# EAGLE board pcb2d (EAGLE 9.7.0)
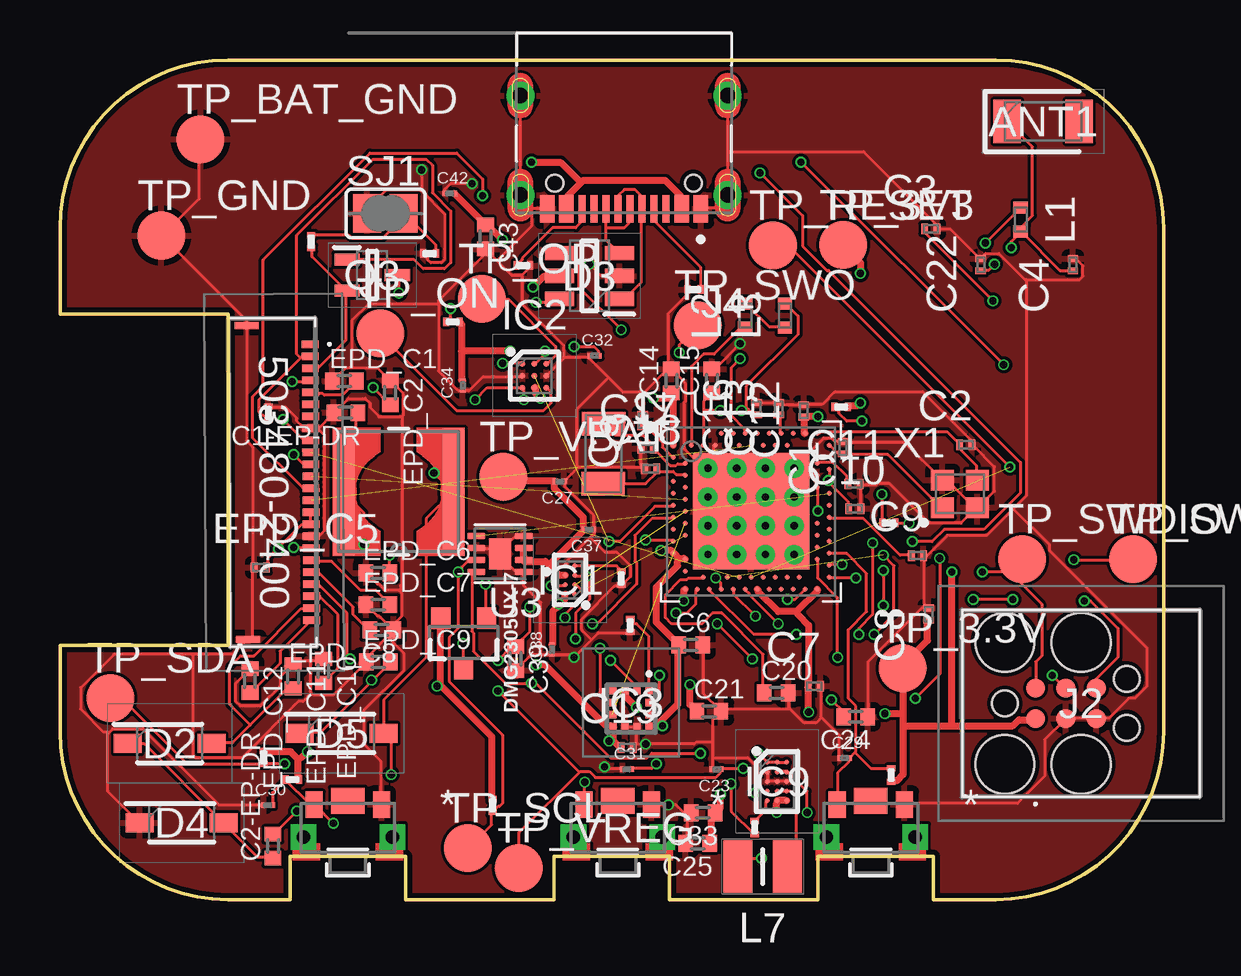
[diagram p0: board, top side]
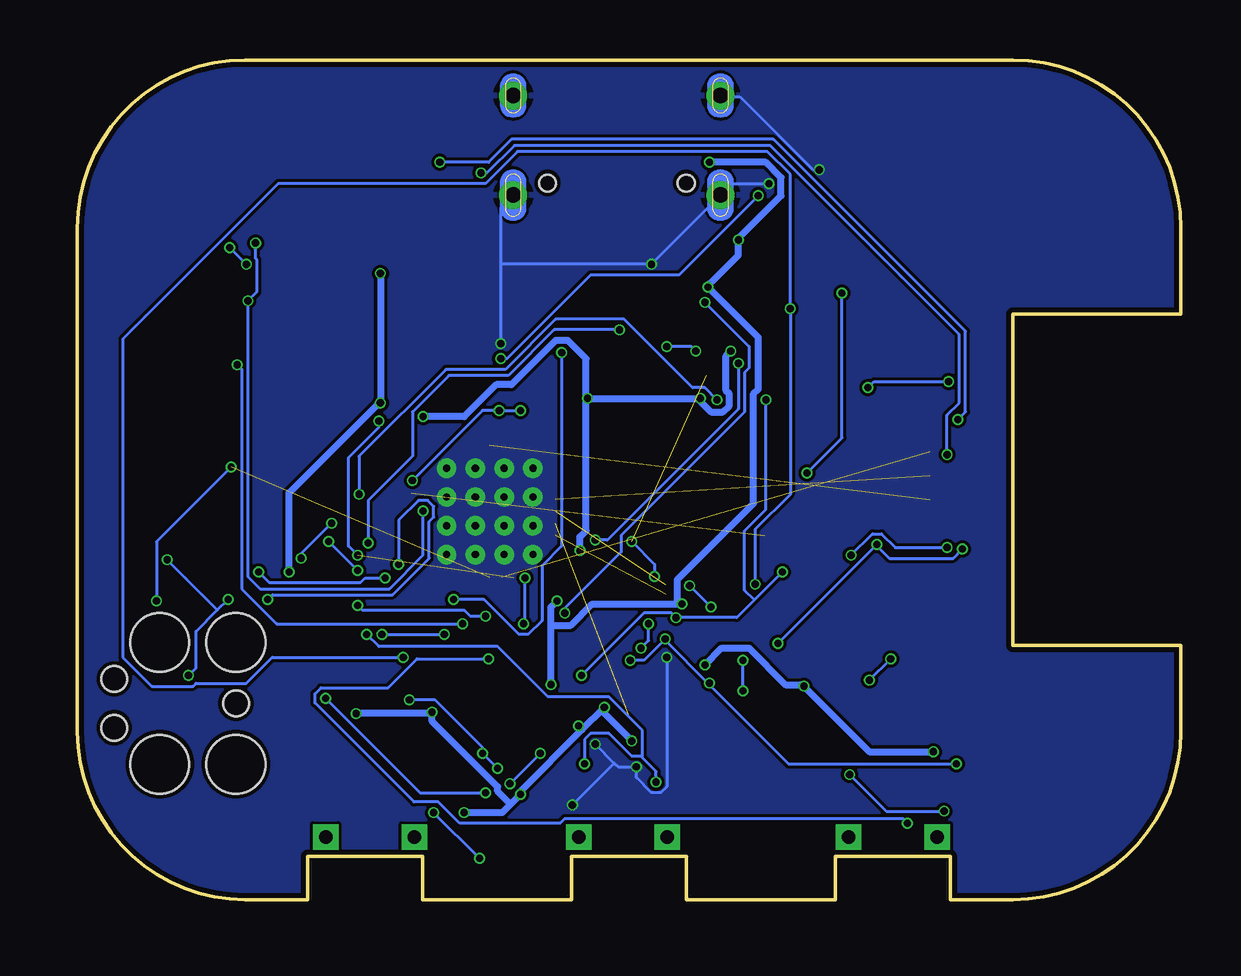
[diagram p1: board, bottom side, seen from below]

Size 46 x 35 mm. Coordinates in mm from the lower left corner, seen from the top.
Outline: 39,0 36.4,0 36.4,1.8 31.6,1.8 31.6,0 25.4,0 25.4,1.8 20.6,1.8 20.6,0 14.4,0 14.4,1.8 9.6,1.8 9.6,0 7,0 arc-90 0,7 0,10.6 7,10.6 7,24.4 0,24.4 0,28 arc-90 7,35 39,35 arc-90 46,28 46,7 arc-90 39,0
Copper layers (1*16): Top 0.035mm / dielectric 1.6mm / Bottom 0.035mm
Design rules "jlcpcb-2layers.dru *": minimum track width 5mil, minimum drill 0.3mm, track to track 5mil, track to pad 5mil, pad to pad 5mil, via to via 5mil, smd to smd 5mil, copper to edge 0.2mm, drill to drill 6mil, minimum pad ring 10mil, minimum via ring 3mil, stop-mask expansion 4mil, vias tented up to drill 0mil, thermal gap 10mil
Net classes: 1 TRASEEPUTERE: width 0.3 mm

## Footprints (pad centres in the part's own frame; a part is rotated, then mirrored left to right if it is on the bottom)
503480-2400_5034802400 = smd 0.3 x 0.7: 1 -5.75,1.525; 2 -5.25,1.525; 3 -4.75,1.525; 4 -4.25,1.525; 5 -3.75,1.525; 6 -3.25,1.525; 7 -2.75,1.525; 8 -2.25,1.525; 9 -1.75,1.525; 10 -1.25,1.525; 11 -0.75,1.525; 12 -0.25,1.525; 13 0.25,1.525; 14 0.75,1.525; 15 1.25,1.525; 16 1.75,1.525; 17 2.25,1.525; 18 2.75,1.525; 19 3.25,1.525; 20 3.75,1.525; 21 4.25,1.525; 22 4.75,1.525; 23 5.25,1.525; 24 5.75,1.525 | smd 0.3 x 1: MP1 -6.54,-1.125; MP2 6.54,-1.125
2450AT18B100E_ANTC3216X140N = smd 1.15 x 1.8: 1 -1.5,0; 2 1.5,0
NORDIC_NRF_3_RESC0201_L = smd 0.28 x 0.43: 1 -0.255,0; 2 0.255,0
PERFECT_0402_0402 = smd 0.6 x 0.7: 1 -0.5,0; 2 0.5,0
GRM011R60J152KE01L_2_CAPC0201X13N = smd 0.22 x 0.23: 1 -0.185,0; 2 0.185,0
ESP32_C6_LIBRARY_5_SOD3716X135N = smd 1.15 x 0.8: 1 -1.75,0; 2 1.75,0
ESP32_C6_LIBRARY_3_SOT95P280X145-6N = smd 1.2 x 0.6: 1 -1.25,0.95; 2 -1.25,0; 3 -1.25,-0.95; 4 1.25,-0.95; 5 1.25,0; 6 1.25,0.95
ESP32_C6_LIBRARY_4_ESP32_C6_LIBRARY_4_ESP32_C6_LIBRARY_4_ESP32_C6_LIBRARY_4_ESP32_WROVER_SPARKFUN-DISCRETESEMI_SOT23-3 = smd 0.8 x 0.9: 1 -0.95,-1; 2 0.95,-1; 3 0,1.1
BQ25180YBGR_BGA8C40P2X4_100X155X50 = smd 0.2 x 0.2: A1 -0.2,0.6; A2 0.2,0.6; B1 -0.2,0.2; B2 0.2,0.2; C1 -0.2,-0.2; C2 0.2,-0.2; D1 -0.2,-0.6; D2 0.2,-0.6
DRV2605YZFR_BGA9C50P3X3_144X144X62 = smd 0.25 x 0.25: A1 -0.5,0.5; A2 0,0.5; A3 0.5,0.5; B1 -0.5,0; B2 0,0; B3 0.5,0; C1 -0.5,-0.5; C2 0,-0.5; C3 0.5,-0.5
BMA423_BMA423 = smd 0.3 x 0.35: 1 -0.75,-0.775; 2 -0.25,-0.775; 3 0.25,-0.775; 4 0.75,-0.775; 7 0.75,0.775; 8 0.25,0.775; 9 -0.25,0.775; 10 -0.75,0.775 | smd 0.35 x 0.3: 5 0.775,-0.25; 6 0.775,0.25; 11 -0.775,0.25; 12 -0.775,-0.25
RT6160AWSC_BGA15C40P3X5_140X230X60 = smd 0.216 x 0.216: A1 -0.4,0.8; A2 0,0.8; A3 0.4,0.8; B1 -0.4,0.4; B2 0,0.4; B3 0.4,0.4; C1 -0.4,0; C2 0,0; C3 0.4,0; D1 -0.4,-0.4; D2 0,-0.4; D3 0.4,-0.4; E1 -0.4,-0.8; E2 0,-0.8; E3 0.4,-0.8
TC2030-IDC_TC2030IDC = smd 0.783 x 0.783: 1 -0.953,-0.635; 2 -0.953,0.635; 3 0.317,-0.635; 4 0.317,0.635; 5 1.588,-0.635; 6 1.588,0.635 | hole 2.451: -2.223,-2.54; -2.223,2.54; 0.952,-2.54; 0.952,2.54 | hole 1.067: -2.223,0; 2.857,-1.016; 2.857,1.016
KH-TYPE-C-16P_KINGHELM_KH-TYPE-C-16P = smd 0.6 x 1.15: A1_B12 -3.2,4.725; A4_B9 -2.4,4.725; A9_B4 2.4,4.725; A12_B1 3.2,4.725 | smd 0.3 x 1.15: A5 -1.25,4.725; A6 -0.25,4.725; A7 0.25,4.725; A8 1.25,4.725; B5 1.75,4.725; B6 0.75,4.725; B7 -0.75,4.725; B8 -1.75,4.725 | drill 0.65 pad 1.05: SH1 -4.32,0; SH2 4.32,0; SH3 -4.32,4.15; SH4 4.32,4.15 | hole 0.7: -2.89,3.65; 2.89,3.65
NORDIC_NRF_2_RESC0402_L = smd 0.5 x 0.6: 1 -0.5,0; 2 0.5,0
ESP32_C6_LIBRARY_2_IND_4828-WE-TPC_WRE = smd 0.9 x 5.3: 1 -2.286,0; 2 2.286,0
MLP2016SR47MT0S1_INDC2016X100N = smd 1.2 x 2.2: 1 -1.028,0; 2 1.028,0
ESP32_C6_LIBRARY_6_SOT65P210X110-3N = smd 1.05 x 0.5: 1 -1.05,0.65; 2 -1.05,-0.65; 3 1.05,0
CPF0201D7K68C1_0201 = smd 0.35 x 0.25: 1 0,0.275; 2 0,-0.275
ESP32_C6_LIBRARY_7_JUMPER_SJ = smd 1.168 x 1.6: 1 -0.762,0; 2 0.762,0
2025-10-22_07-23-44_LIBRARY_SW_EVP-AKE31A_PAN = smd 0.711 x 1.092: 1 -1.4,-0.972; 2 1.4,-0.972 | drill 0.559 pad 0.914 square: 3 -1.848,0.381; 4 1.848,0.381 | smd 1.397 x 1.092: 5 0,-1.124
HECTOR_WATCH_1_TP20R = smd 2 x 2: TP 0,0
NORDIC_NRF_4_AQFN50P700X700X85_HS-74N = smd 4.85 x 4.85: P$74 0,0 | drill 0.3 pad 0.6: P$75 -1.8,1.8; P$76 -0.6,1.8; P$77 0.6,1.8; P$78 1.8,1.8; P$79 -1.8,0.6; P$80 -0.6,0.6; P$81 0.6,0.6; P$82 1.8,0.6; P$83 -1.8,-0.6; P$84 -0.6,-0.6; P$85 0.6,-0.6; P$86 1.8,-0.6; P$87 -1.8,-1.8; P$88 -0.6,-1.8; P$89 0.6,-1.8; P$90 1.8,-1.8 | smd 0.2 x 0.2: P$A8 -1.25,3.25; P$A10 -0.75,3.25; P$A12 -0.25,3.25; P$A14 0.25,3.25; P$A16 0.75,3.25; P$A18 1.25,3.25; P$A20 1.75,3.25; P$A22 2.25,3.25; P$A23 2.75,3.25; P$AA24 3.25,-2.25; P$AB2 -2.75,-2.5; P$AC5 -2,-2.75; P$AC9 -1,-2.75; P$AC11 -0.5,-2.75; P$AC13 0,-2.75; P$AC15 0.5,-2.75; P$AC17 1,-2.75; P$AC19 1.5,-2.75; P$AC21 2,-2.75; P$AC24 3.25,-2.75; P$AD2 -2.75,-3.25; P$AD4 -2.25,-3.25; P$AD6 -1.75,-3.25; P$AD8 -1.25,-3.25; P$AD10 -0.75,-3.25; P$AD12 -0.25,-3.25; P$AD14 0.25,-3.25; P$AD16 0.75,-3.25; P$AD18 1.25,-3.25; P$AD20 1.75,-3.25; P$AD22 2.25,-3.25; P$AD23 2.75,-3.25; P$B1 -3.25,2.75; P$B3 -2.5,2.75; P$B5 -2,2.75; P$B7 -1.5,2.75; P$B9 -1,2.75; P$B11 -0.5,2.75; P$B13 0,2.75; P$B15 0.5,2.75; P$B17 1,2.75; P$B19 1.5,2.75; P$B24 3.25,2.75; P$C1 -3.25,2.25; P$D2 -2.75,2; P$D23 2.75,2; P$E24 3.25,1.75; P$F2 -2.75,1.5; P$F23 2.75,1.5; P$G1 -3.25,1.25; P$H2 -2.75,1; P$H23 2.75,1; P$J1 -3.25,0.75; P$J24 3.25,0.75; P$K2 -2.75,0.5; P$L1 -3.25,0.25; P$L24 3.25,0.25; P$M2 -2.75,0; P$N1 -3.25,-0.25; P$N24 3.25,-0.25; P$P2 -2.75,-0.5; P$P23 2.75,-0.5; P$R1 -3.25,-0.75; P$R24 3.25,-0.75; P$T2 -2.75,-1; P$T23 2.75,-1; P$U1 -3.25,-1.25; P$U24 3.25,-1.25; P$V23 2.75,-1.5; P$W1 -3.25,-1.75; P$W24 3.25,-1.75; P$Y2 -2.75,-2; P$Y23 2.75,-2
ESP32_C6_LIBRARY_SON50P200X200X80-9N = smd 0.76 x 0.27: 1 -0.985,0.75; 2 -0.985,0.25; 3 -0.985,-0.25; 4 -0.985,-0.75; 5 0.985,-0.75; 6 0.985,-0.25; 7 0.985,0.25; 8 0.985,0.75 | smd 0.9 x 1.3: 9 0,0
NORDIC_NRF_BT-XTAL_2016_N = smd 0.95 x 0.85: 1 -0.725,-0.575; 2 0.725,-0.575; 3 0.725,0.575; 4 -0.725,0.575
NORDIC_NRF_1_XTAL_3215_N = smd 1 x 1.8: 1 -1.25,0; 2 1.25,0

## Placement (x,y rotation side)
503480-2400  503480-2400_503480-2400  [503480-2400_5034802400]  8.94,17.39 270.3 top
ANT1  2450AT18B100E  [2450AT18B100E_ANTC3216X140N]  40.98,32.44 0 top
C1  12pF  [NORDIC_NRF_3_RESC0201_L]  32.64,18.84 90 top
C1-EP-DR  10uF  [PERFECT_0402_0402]  11.91,20.29 180 top
C2  12pF  [NORDIC_NRF_3_RESC0201_L]  37.76,18.96 0 top
C2-EP-DR  4.7uF/25V  [PERFECT_0402_0402]  8.88,2.22 90 top
C3  1pF  [NORDIC_NRF_3_RESC0201_L]  36.3,27.96 0 top
C4  1pF  [NORDIC_NRF_3_RESC0201_L]  42.22,26.46 90 top
C5  100nF  [NORDIC_NRF_3_RESC0201_L]  24.29,19.96 90 top
C6  4.7µF  [PERFECT_0402_0402]  26.29,10.62 0 top
C7  100nF  [NORDIC_NRF_3_RESC0201_L]  31.44,8.9 0 top
C8  100nF  [NORDIC_NRF_3_RESC0201_L]  36.21,11.9 90 top
C9  820pF  [NORDIC_NRF_3_RESC0201_L]  35.74,14.34 0 top
C10  N.C  [NORDIC_NRF_3_RESC0201_L]  33.13,16.29 0 top
C11  100pF  [NORDIC_NRF_3_RESC0201_L]  33.1,17.32 0 top
C12  100nF  [NORDIC_NRF_3_RESC0201_L]  31,20.37 90 top
C13  N.C  [NORDIC_NRF_3_RESC0201_L]  29.96,20.46 90 top
C14  4.7µF  [PERFECT_0402_0402]  25.48,21.62 90 top
C15  1.0µF  [PERFECT_0402_0402]  27.17,21.62 90 top
C16  47nF  [NORDIC_NRF_3_RESC0201_L]  29.04,20.46 90 top
C17  12pF  [NORDIC_NRF_3_RESC0201_L]  24.47,18.81 0 top
C18  12pF  [NORDIC_NRF_3_RESC0201_L]  24.62,17.96 0 top
C19  100nF  [NORDIC_NRF_3_RESC0201_L]  23.64,6.34 0 top
C20  4.7µF  [PERFECT_0402_0402]  29.86,8.62 0 top
C21  4.7µF  [PERFECT_0402_0402]  27.05,7.85 0 top
C22  N.C  [NORDIC_NRF_3_RESC0201_L]  38.38,26.46 90 top
C23  0.1uF  [GRM011R60J152KE01L_2_CAPC0201X13N]  27.37,5.43 180 top
C24  10uF  [PERFECT_0402_0402]  33.17,7.62 180 top
C25  22uF  [PERFECT_0402_0402]  26.58,2.34 180 top
C27  0.1uF  [GRM011R60J152KE01L_2_CAPC0201X13N]  20.83,17.43 180 top
C29  1uF  [GRM011R60J152KE01L_2_CAPC0201X13N]  32.71,5.89 0 top
C30  1uF  [GRM011R60J152KE01L_2_CAPC0201X13N]  8.67,3.93 0 top
C31  1uF  [GRM011R60J152KE01L_2_CAPC0201X13N]  23.63,5.43 0 top
C32  1uF  [GRM011R60J152KE01L_2_CAPC0201X13N]  22.28,22.67 0 top
C33  22uF  [PERFECT_0402_0402]  26.81,3.62 180 top
C34  0.1uF  [GRM011R60J152KE01L_2_CAPC0201X13N]  16.79,21.43 90 top
C37  1uF  [GRM011R60J152KE01L_2_CAPC0201X13N]  22.05,15.43 180 top
C38  1uF  [GRM011R60J152KE01L_2_CAPC0201X13N]  20.51,10.43 90 top
C39  10uF  [PERFECT_0402_0402]  18.99,10.05 270 top
C42  0.1uF  [GRM011R60J152KE01L_2_CAPC0201X13N]  16.25,29.43 0 top
C43  4.7uF  [PERFECT_0402_0402]  17.74,27.62 270 top
D2  MBR0530  [ESP32_C6_LIBRARY_5_SOD3716X135N]  4.57,6.5 0 top
D3  USBLC6-2SC6Y  [ESP32_C6_LIBRARY_3_SOT95P280X145-6N]  22.07,26 180 top
D4  MBR0530  [ESP32_C6_LIBRARY_5_SOD3716X135N]  5.07,3.2 0 top
D5  MBR0530  [ESP32_C6_LIBRARY_5_SOD3716X135N]  11.74,6.93 0 top
DMG2305UX-7  20V/4.2A/52mΩ/1.4W  [ESP32_C6_LIBRARY_4_ESP32_C6_LIBRARY_4_ESP32_C6_LIBRARY_4_ESP32_C6_LIBRARY_4_ESP32_WROVER_SPARKFUN-DISCRETESEMI_SOT23-3]  16.83,10.72 180 top
EPD_C1  1uF/50V  [PERFECT_0402_0402]  11.85,21.62 0 top
EPD_C2  1uF/50V  [PERFECT_0402_0402]  13.77,21.13 270 top
EPD_C5  0.1uF/50V  [NORDIC_NRF_3_RESC0201_L]  8.35,13.84 0 top
EPD_C6  1uF/50V  [PERFECT_0402_0402]  13.25,13.62 0 top
EPD_C7  1uF/50V  [PERFECT_0402_0402]  13.26,12.29 0 top
EPD_C8  1uF/50V  [PERFECT_0402_0402]  13.41,11.23 180 top
EPD_C9  1uF/50V  [PERFECT_0402_0402]  13.27,9.91 0 top
EPD_C10  1uF/50V  [PERFECT_0402_0402]  10.99,9.53 270 top
EPD_C11  1uF/50V  [PERFECT_0402_0402]  9.72,9.3 270 top
EPD_C12  1uF/50V  [PERFECT_0402_0402]  7.92,9.12 270 top
IC1  BQ25180YBGR  [BQ25180YBGR_BGA8C40P2X4_100X155X50]  21.26,13.32 180 top
IC2  DRV2605YZFR  [DRV2605YZFR_BGA9C50P3X3_144X144X62]  19.78,21.84 0 top
IC3  BMA421  [BMA423_BMA423]  23.81,7.96 180 top
IC9  RT6160AWSC  [RT6160AWSC_BGA15C40P3X5_140X230X60]  29.89,4.92 0 top
J2  TC2030-IDC  [TC2030-IDC_TC2030IDC]  41.61,8.18 0 top
J4  KH-TYPE-C-16P  [KH-TYPE-C-16P_KINGHELM_KH-TYPE-C-16P]  23.51,33.52 180 top
L1  3.9nH  [NORDIC_NRF_2_RESC0402_L]  40.05,28.34 270 top
L2  10µH  [NORDIC_NRF_2_RESC0402_L]  28.57,24.34 90 top
L3  15nH  [NORDIC_NRF_2_RESC0402_L]  30.22,24.34 90 top
L5  68uH  [ESP32_C6_LIBRARY_2_IND_4828-WE-TPC_WRE]  14.12,17 180 top
L7  FTC252012SR47MBCA  [MLP2016SR47MT0S1_INDC2016X100N]  29.29,1.38 0 top
Q3  SI1308EDL-T1-GE3  [ESP32_C6_LIBRARY_6_SOT65P210X110-3N]  13.01,26.03 0 top
R1_EP_DR  0.47  [CPF0201D7K68C1_0201]  10.47,27.43 0 top
R1_USB  5K1  [CPF0201D7K68C1_0201]  26.43,25.43 90 top
R2  0  [CPF0201D7K68C1_0201]  28.95,3 180 top
R2_EP_DR  10K  [CPF0201D7K68C1_0201]  8.69,20.28 0 top
R2_USB  5K1  [CPF0201D7K68C1_0201]  19.31,26.43 90 top
R3  0  [CPF0201D7K68C1_0201]  23.77,11.43 0 top
R4  0  [CPF0201D7K68C1_0201]  34.55,15.7 90 top
R5  10K  [CPF0201D7K68C1_0201]  9.69,5 90 top
R7  10K  [CPF0201D7K68C1_0201]  34.65,5.19 0 top
R8  10K  [CPF0201D7K68C1_0201]  32.56,20.53 90 top
R9  10K  [CPF0201D7K68C1_0201]  23.4,13.39 180 top
R17  3K3  [CPF0201D7K68C1_0201]  18.03,3.93 0 top
R18  3K3  [CPF0201D7K68C1_0201]  8.49,5.93 0 top
R_PWR_EPD  10K  [CPF0201D7K68C1_0201]  16.38,24.08 90 top
R_TYPE_SEL  2.2  [CPF0201D7K68C1_0201]  15.41,26.93 90 top
SJ1  [ESP32_C6_LIBRARY_7_JUMPER_SJ]  13.57,28.6 0 top
SW_DN  2025-10-22_07-23-44_LIBRARY_EVP-AKE31ASW_EVP-AKE31A_PAN  [2025-10-22_07-23-44_LIBRARY_SW_EVP-AKE31A_PAN]  33.8,2.99 180 top
SW_ENT  2025-10-22_07-23-44_LIBRARY_EVP-AKE31ASW_EVP-AKE31A_PAN  [2025-10-22_07-23-44_LIBRARY_SW_EVP-AKE31A_PAN]  23.25,2.99 180 top
SW_UP  2025-10-22_07-23-44_LIBRARY_EVP-AKE31ASW_EVP-AKE31A_PAN  [2025-10-22_07-23-44_LIBRARY_SW_EVP-AKE31A_PAN]  12,2.99 180 top
TP_3.3V  HECTOR_WATCH_1_TPTP20R  [HECTOR_WATCH_1_TP20R]  35.13,9.65 0 top
TP_3V3  HECTOR_WATCH_1_TPTP20R  [HECTOR_WATCH_1_TP20R]  32.65,27.28 0 top
TP_BAT_GND  HECTOR_WATCH_1_TPTP20R  [HECTOR_WATCH_1_TP20R]  5.86,31.69 0 top
TP_GND  HECTOR_WATCH_1_TPTP20R  [HECTOR_WATCH_1_TP20R]  4.22,27.68 0 top
TP_ON  HECTOR_WATCH_1_TPTP20R  [HECTOR_WATCH_1_TP20R]  13.35,23.6 0 top
TP_OP  HECTOR_WATCH_1_TPTP20R  [HECTOR_WATCH_1_TP20R]  17.59,25.04 0 top
TP_RESET  HECTOR_WATCH_1_TPTP20R  [HECTOR_WATCH_1_TP20R]  29.72,27.27 0 top
TP_SCL  HECTOR_WATCH_1_TPTP20R  [HECTOR_WATCH_1_TP20R]  17,2.14 0 top
TP_SDA  HECTOR_WATCH_1_TPTP20R  [HECTOR_WATCH_1_TP20R]  2.1,8.39 0 top
TP_SWDCLK  HECTOR_WATCH_1_TPTP20R  [HECTOR_WATCH_1_TP20R]  44.72,14.19 0 top
TP_SWDIO  HECTOR_WATCH_1_TPTP20R  [HECTOR_WATCH_1_TP20R]  40.1,14.19 0 top
TP_SWO  HECTOR_WATCH_1_TPTP20R  [HECTOR_WATCH_1_TP20R]  26.59,23.94 0 top
TP_VBAT  HECTOR_WATCH_1_TPTP20R  [HECTOR_WATCH_1_TP20R]  18.48,17.62 0 top
TP_VREG  HECTOR_WATCH_1_TPTP20R  [HECTOR_WATCH_1_TP20R]  19.12,1.31 0 top
U1  NRF52840_QF  [NORDIC_NRF_4_AQFN50P700X700X85_HS-74N]  28.81,16.18 0 top
U3  MAX17048G+T10  [ESP32_C6_LIBRARY_SON50P200X200X80-9N]  18.34,14.41 180 top
X1  32MHz  [NORDIC_NRF_BT-XTAL_2016_N]  37.51,16.91 0 top
X2  32.768kHz  [NORDIC_NRF_1_XTAL_3215_N]  22.65,18.58 269.4 top

## Library data of the parts
503480-2400 = LIBRARY; DESCRIPTION: FFC & FPC Connectors 0.5mm FPC RA SMT Dual Contact 24Ckt; HEIGHT: 1.87mm; MANUFACTURER_NAME: Molex; MANUFACTURER_PART_NUMBER: 503480-2400; MOUSER_PART_NUMBER: 538-503480-2400; MOUSER_PRICE-STOCK: https://www.mouser.co.uk/ProductDetail/Molex/503480-2400?qs=OAhjpuo3Vu7efIoxFh9AOw%3D%3D
ANT1 = LIBRARY; ARROW_PART_NUMBER: 2450AT18B100E; ARROW_PRICE-STOCK: https://www.arrow.com/en/products/2450at18b100e/johanson-dielectrics?utm_currency=USD&region=nac; DESCRIPTION: Antennas 2.45GHz ANTENNA; HEIGHT: 1.4mm; MANUFACTURER_NAME: JOHANSON TECHNOLOGY; MANUFACTURER_PART_NUMBER: 2450AT18B100E; MOUSER_PART_NUMBER: 609-2450AT18B100E; MOUSER_PRICE-STOCK: https://www.mouser.co.uk/ProductDetail/Johanson-Technology/2450AT18B100E?qs=yCnrNFeXz%252Bh5MFsFIXGZGA%3D%3D
C1 C1-EP-DR C2 C2-EP-DR C3-C22 C24 C25 C33 C39 C43 EPD_C1 EPD_C2 EPD_C5-EPD_C12 L1-L3 R1_EP_DR R1_USB R2 R2_EP_DR R2_USB R3-R5 R7-R9 R17 R18 R_PWR_EPD R_TYPE_SEL SJ1 TP_3.3V TP_3V3 TP_BAT_GND TP_GND TP_ON TP_OP TP_RESET TP_SCL TP_SDA TP_SWDCLK TP_SWDIO TP_SWO TP_VBAT TP_VREG U1 X1 X2 = LIBRARY
C23 C27 C29-C32 C34 C37 C38 C42 = LIBRARY; AVAILABILITY: In Stock; CHECK_PRICES: https://www.snapeda.com/parts/GRM011R60J152KE01L/Murata/view-part/?ref=eda; DESCRIPTION: SMD Capacitor X5R(EIA) with Capacitance: 1500pF Tol. 10%. Rated Voltage: 6.3Vdc; MF: Murata; MP: GRM011R60J152KE01L; PACKAGE: 0201 Murata; PRICE: None; SNAPEDA_LINK: https://www.snapeda.com/parts/GRM011R60J152KE01L/Murata/view-part/?ref=snap
D2 D4 D5 = LIBRARY; AVAILABILITY: In Stock; CHECK_PRICES: https://www.snapeda.com/parts/MBR0530/Onsemi/view-part/?ref=eda; DESCRIPTION: Diode Schottky 30 V 500mA Surface Mount SOD-123; MF: ON Semiconductor; MP: MBR0530; PACKAGE: SOD-123-2 ON Semiconductor; PRICE: None; PURCHASE-URL: https://www.snapeda.com/api/url_track_click_mouser/?unipart_id=179458&manufacturer=ON Semiconductor&part_name=MBR0530&search_term=None; SNAPEDA_LINK: https://www.snapeda.com/parts/MBR0530/Onsemi/view-part/?ref=snap
D3 = LIBRARY; AVAILABILITY: In Stock; CHECK_PRICES: https://www.snapeda.com/parts/USBLC6-2SC6Y/STMicroelectronics/view-part/?ref=eda; DESCRIPTION: 17V Clamp 5A (8/20µs) Ipp Tvs Diode Surface Mount SOT-23-6; MF: STMicroelectronics; MP: USBLC6-2SC6Y; PACKAGE: SOT-23-6 STMicroelectronics; PRICE: None; SNAPEDA_LINK: https://www.snapeda.com/parts/USBLC6-2SC6Y/STMicroelectronics/view-part/?ref=snap
DMG2305UX-7 = LIBRARY; PROD_ID: TRAN-14388
IC1 = LIBRARY; ARROW_PART_NUMBER: BQ25180YBGR; ARROW_PRICE-STOCK: https://www.arrow.com/en/products/bq25180ybgr/texas-instruments?utm_currency=USD&region=nac; DESCRIPTION: Charger IC Lithium Ion/Polymer, Lithium Iron Phosphate 8-DSBGA (1.6x1.1); HEIGHT: 0.5mm; MANUFACTURER_NAME: Texas Instruments; MANUFACTURER_PART_NUMBER: BQ25180YBGR; MOUSER_PART_NUMBER: 595-BQ25180YBGR; MOUSER_PRICE-STOCK: https://www.mouser.co.uk/ProductDetail/Texas-Instruments/BQ25180YBGR?qs=doiCPypUmgEWjAK%252BJAX6Tw%3D%3D
IC2 = LIBRARY; ARROW_PART_NUMBER: DRV2605YZFR; ARROW_PRICE-STOCK: https://www.arrow.com/en/products/drv2605yzfr/texas-instruments?region=nac; DESCRIPTION: Haptic Driver for ERM/LRA with Built-In Library and Smart Loop Architecture; HEIGHT: 0.625mm; MANUFACTURER_NAME: Texas Instruments; MANUFACTURER_PART_NUMBER: DRV2605YZFR
IC3 = LIBRARY; ARROW_PART_NUMBER: BMA423; ARROW_PRICE-STOCK: https://www.arrow.com/en/products/bma423/bosch; DESCRIPTION: Accelerometers Triaxial low-g 12bit Acceleration Sensor; HEIGHT: 1mm; MANUFACTURER_NAME: BOSCH; MANUFACTURER_PART_NUMBER: BMA423; MOUSER_PART_NUMBER: 262-BMA423; MOUSER_PRICE-STOCK: https://www.mouser.co.uk/ProductDetail/Bosch-Sensortec/BMA423?qs=HXFqYaX1Q2xC%252BSgeGoX3mg%3D%3D
IC9 = LIBRARY; DESCRIPTION: Buck-Boost Regulator Positive Output Step-Up/Step-Down I2C DC-DC Controller IC 15-WL-CSP (BSC) (1.4x2.3); HEIGHT: 0.6mm; MANUFACTURER_NAME: RICHTEK; MANUFACTURER_PART_NUMBER: RT6160AWSC; MOUSER_PART_NUMBER: 835-RT6160AWSC; MOUSER_PRICE-STOCK: https://www.mouser.co.uk/ProductDetail/Richtek/RT6160AWSC?qs=amGC7iS6iy%2FLd9PSoixZXQ%3D%3D
J2 = LIBRARY; DESCRIPTION: CABLE ADAPTER 6 POS; HEIGHT: 19mm; MANUFACTURER_NAME: Tag Connect; MANUFACTURER_PART_NUMBER: TC2030-IDC
J4 = LIBRARY; AVAILABILITY: Not in stock; CHECK_PRICES: https://www.snapeda.com/parts/KH-TYPE-C-16P/Kinghelm/view-part/?ref=eda; MF: kinghelm; MP: KH-TYPE-C-16P; PACKAGE: None; PRICE: None; SNAPEDA_LINK: https://www.snapeda.com/parts/KH-TYPE-C-16P/Kinghelm/view-part/?ref=snap
L5 = LIBRARY; COPYRIGHT: Copyright (C) 2024 Ultra Librarian. All rights reserved.; MANUFACTURER_PART_NUMBER: 744043680; MFR_NAME: Wurth Electronics
L7 = LIBRARY; DESCRIPTION: SMD / SMT Inductors (Coils), L=0.47?H, L x W x T :; HEIGHT: 1mm; JLCPCB: https://jlcpcb.com/partdetail/6763488-FTC252012SR47MBCA/C5832368; MANUFACTURER_NAME: TDK; MANUFACTURER_PART_NUMBER: FTC252012SR47MBCA
Q3 = LIBRARY; AVAILABILITY: In Stock; CHECK_PRICES: https://www.snapeda.com/parts/SI1308EDL-T1-GE3/Vishay+Siliconix/view-part/?ref=eda; DESCRIPTION: Si1308EDL-T1-GE3 N-channel MOSFET Transistor, 1.5 A, 30 V, 3-Pin SC-70 | Siliconix / Vishay SI1308EDL-T1-GE3; MF: Vishay Siliconix; MP: SI1308EDL-T1-GE3; PACKAGE: SOT-323 Vishay Semiconductor; PRICE: None; PURCHASE-URL: https://www.snapeda.com/api/url_track_click_mouser/?unipart_id=274603&manufacturer=Vishay Siliconix&part_name=SI1308EDL-T1-GE3&search_term=None; SNAPEDA_LINK: https://www.snapeda.com/parts/SI1308EDL-T1-GE3/Vishay+Siliconix/view-part/?ref=snap
SW_DN SW_ENT SW_UP = LIBRARY; COPYRIGHT: Copyright (C) 2025 Ultra Librarian. All rights reserved.; DIGI-KEY_PART_NUMBER_1: P123437TR-ND; DIGI-KEY_PART_NUMBER_2: P123437CT-ND; DIGI-KEY_PART_NUMBER_3: P123437DKR-ND; MANUFACTURER_NAME: Panasonic; MANUFACTURER_PART_NUMBER: EVP-AKE31A
U3 = LIBRARY; AVAILABILITY: In Stock; CHECK_PRICES: https://www.snapeda.com/parts/MAX17048G+T10/Analog+Devices/view-part/?ref=eda; DESCRIPTION: 3µA 1-Cell/2-Cell Fuel Gauge with ModelGauge; MF: Analog Devices; MP: MAX17048G+T10; PACKAGE: TDFN-8 Maxim; PRICE: None; PURCHASE-URL: https://www.snapeda.com/api/url_track_click_mouser/?unipart_id=329239&manufacturer=Analog Devices&part_name=MAX17048G+T10&search_term=None; SNAPEDA_LINK: https://www.snapeda.com/parts/MAX17048G+T10/Analog+Devices/view-part/?ref=snap

## Nets
3V3 [TRASEEPUTERE]: C6.1 C7.1 C8.1 C12.1 C14.1 C19.1 C25.1 C33.1 C34.2 DMG2305UX-7.2 IC2.C2 IC3.3 IC3.7 IC3.10 IC9.E2 IC9.E3 J2.1 R5.2 R7.2 R8.2 R17.1 R18.1 R_PWR_EPD.2 TP_3.3V.TP TP_3V3.TP U1.P$A22 U1.P$AD14 U1.P$AD23 U1.P$B1 U1.P$W1 U1.P$Y2
ALERT: U1.P$J24 U3.5
D+: D3.4 U1.P$AD6
D-: D3.6 U1.P$AD4
DN: D3.1 J4.A7 J4.B7
DP: D3.3 J4.A6 J4.B6
EPD_3V3: 503480-2400.15 503480-2400.16 C1-EP-DR.1 DMG2305UX-7.3 EPD_C5.2 L5.2
EPD_BUSY: 503480-2400.9 U1.P$AD12
EPD_CS: 503480-2400.12 U1.P$K2
EPD_DC: 503480-2400.11 U1.P$AD10
EPD_RST: 503480-2400.10 U1.P$AC11
GDR: 503480-2400.2 Q3.1 R2_EP_DR.2
GND: 503480-2400.8 503480-2400.17 503480-2400.MP1 503480-2400.MP2 C1-EP-DR.2 C1.2 C2.2 C3.2 C4.2 C5.2 C6.2 C7.2 C8.2 C9.2 C10.2 C11.2 C12.2 C13.2 C14.2 C15.2 C16.2 C17.1 C18.1 C19.2 C20.2 C21.2 C22.2 C23.2 C24.1 C25.2 C27.1 C29.1 C30.1 C31.1 C32.1 C33.2 C34.1 C37.1 C38.1 C39.2 C42.1 C43.2 D3.2 D4.1 EPD_C1.1 EPD_C2.1 EPD_C5.1 EPD_C6.1 EPD_C7.1 EPD_C8.1 EPD_C9.1 EPD_C10.1 EPD_C11.1 EPD_C12.1 IC1.D2 IC2.B1 IC2.B3 IC3.8 IC3.9 IC9.B1 IC9.C1 IC9.C2 IC9.C3 J2.3 J2.5 J4.A1_B12 J4.A12_B1 J4.SH1 J4.SH2 J4.SH3 J4.SH4 R1_USB.1 R2_EP_DR.1 R2_USB.2 R3.2 R9.1 R_TYPE_SEL.1 SJ1.1 SW_DN.1 SW_ENT.1 SW_UP.1 TP_BAT_GND.TP TP_GND.TP U1.P$74 U1.P$75 U1.P$76 U1.P$77 U1.P$78 U1.P$79 U1.P$80 U1.P$81 U1.P$82 U1.P$83 U1.P$84 U1.P$85 U1.P$86 U1.P$87 U1.P$88 U1.P$89 U1.P$90 U1.P$B7 U1.P$F23 U3.1 U3.4 U3.6 U3.9 X1.2 X1.4
HAPTIC_EN: IC2.A1 U1.P$U1
IMU_INT1: IC3.5 U1.P$N1
IMU_INT2: IC3.6 U1.P$P2
LX1: IC9.B2 IC9.B3 L7.1
LX2: IC9.D2 IC9.D3 L7.2
MOSI: 503480-2400.14 U1.P$B13
N$2: C3.1 L1.1 U1.P$H23
N$3: IC9.D1 R4.2
N$4: IC1.D1 R9.2
N$5: C9.1 U1.P$N24
N$6: IC9.E1 R2.2
N$7: ANT1.1 C4.1 C22.1 L1.2
N$8: C11.1 U1.P$D23
N$9: IC3.1 R3.1
N$10: L2.2 L3.1
N$11: C20.1 U1.P$AC5
N$12: C5.1 U1.P$C1
N$13: C17.2 U1.P$D2 X2.1
N$14: C18.2 U1.P$F2 X2.2
N$15: C1.1 U1.P$B24 X1.1
N$17: C2.1 U1.P$A23 X1.3
N$18: C10.1 C15.1 C16.1 L3.2 U1.P$B5 U1.P$E24
N$19: C13.1 U1.P$A18
N$20: L2.1 U1.P$B3
N$22: C2-EP-DR.2 D5.2 L5.1 Q3.3
N$23: C2-EP-DR.1 D2.1 D4.2
N$24: R1_EP_DR.1 R_TYPE_SEL.2 SJ1.2
N$26: 503480-2400.5 EPD_C1.2
N$27: 503480-2400.4 EPD_C2.2
N$28: 503480-2400.18 EPD_C6.2
N$29: C32.2 IC2.A2
N$30: 503480-2400.19 EPD_C7.2
N$31: 503480-2400.20 EPD_C8.2
N$33: 503480-2400.22 EPD_C10.2
N$35: 503480-2400.24 EPD_C12.2
N$37: J4.A5 R1_USB.2
N$40: J4.B5 R2_USB.1
OUT+: IC2.A3 TP_OP.TP
OUT-: IC2.C3 TP_ON.TP
P0.04: U1.P$J1
P0.09: U1.P$L24
P0.13: C30.2 R5.1 SW_UP.2 U1.P$AD8
P0.14: C31.2 R8.1 SW_ENT.2 U1.P$AC9
P0.19: U1.P$AC15
P0.20: U1.P$AD16
P0.21: U1.P$AC17
P0.22: U1.P$AD18
P0.23: U1.P$AC19
P0.24: U1.P$AD20
P0.25: U1.P$AC21
P0.26: U1.P$G1
P0.27: U1.P$H2
P0.28: U1.P$B11
P0.29: U1.P$A10
P0.30: U1.P$B9
P0.31: U1.P$A8
P1.01: DMG2305UX-7.1 R_PWR_EPD.1 U1.P$Y23
P1.02: C29.2 R7.1 SW_DN.2 U1.P$W24
P1.03: U1.P$V23
P1.04: U1.P$U24
P1.05: U1.P$T23
P1.06: U1.P$R24
P1.07: U1.P$P23
P1.09: U1.P$R1
P1.10: U1.P$A20
P1.11: U1.P$B19
P1.12: U1.P$B17
P1.13: U1.P$A16
P1.14: U1.P$B15
P1.15: U1.P$A14
PMIC_INT: IC1.A1 U1.P$T2
PREVGH: 503480-2400.21 D5.1 EPD_C9.2
PREVGL: 503480-2400.23 D2.2 EPD_C11.2
RESE: 503480-2400.3 Q3.2 R1_EP_DR.2
RESET: J2.6 TP_RESET.TP U1.P$AC13
SCK: 503480-2400.13 U1.P$A12
SCL: IC1.B1 IC2.C1 IC3.12 R4.1 R17.2 TP_SCL.TP U1.P$M2 U3.7
SDA: IC1.C1 IC2.B2 IC3.2 R2.1 R18.2 TP_SDA.TP U1.P$L1 U3.8
SWDCLK: J2.4 TP_SWDCLK.TP U1.P$AA24
SWDIO: J2.2 TP_SWDIO.TP U1.P$AC24
SWO: TP_SWO.TP U1.P$AD22
VBAT [TRASEEPUTERE]: C27.2 C37.2 IC1.C2 TP_VBAT.TP U3.2 U3.3
VBUS [TRASEEPUTERE]: C21.1 C38.2 C42.2 C43.1 D3.5 IC1.A2 J4.A4_B9 J4.A9_B4 U1.P$AD2
VREG: C23.1 C24.2 C39.1 IC1.B2 IC9.A1 IC9.A2 IC9.A3 TP_VREG.TP

## Tracks (layer width: path | path; a pad name or v marks a point on that pad's centre or on a via)
3V3  (via drill 0.3)
  Top 0.3: v33.37,20.7 33.24,20.58 32.86,20.58 R8.2 | v33.37,26.1 33.37,26.55 32.67,27.25 TP_3V3.TP | 35.15,7.75 35.15,9.59 TP_3.3V.TP 35.15,9.78 36.16,10.8 36.16,11.62 C8.1 | 35.15,7.75 35.15,7.24 | 35.15,7.24 35.15,5.21 34.89,4.96 34.7,4.96 R7.2 | 35.15,7.24 37.18,7.24 | 37.18,7.24 39.72,7.24 39.97,7.5 40.6,7.5 J2.1 | 37.18,7.24 v37.18,13.66 | 16.73,22.86 16.73,24.01 16.67,24.07 R_PWR_EPD.2 | 16.73,22.86 16.73,21.66 C34.2 | U1.P$A22 31.02,19.43 31.02,20.07 C12.1 31.14,20.13 v31.59,20.13 | U1.P$B1 25.56,18.99 25.56,21.02 25.49,21.09 C14.1 25.43,20.89 v24.73,20.89 | v20.03,20.89 19.84,21.09 19.84,21.34 IC2.C2 | v18.76,22.86 16.73,22.86 | 9.94,5.85 9.62,6.16 8.54,6.16 R18.1 | 9.94,5.85 9.94,5.02 R5.2 | 15.84,8.96 18,6.8 18,4.26 R17.1 | 15.84,8.96 15.84,11.69 DMG2305UX-7.2 | v10.32,6.16 10.06,5.91 9.94,5.85 | v15.71,8.89 15.84,8.96 | 25.81,14.23 26,14.23 U1.P$Y2 | 25.81,14.23 25.62,14.42 U1.P$W1 25.49,14.54 v25.05,14.54 | 25.02,7.4 25.75,8.13 25.75,10.61 C6.1 25.68,10.73 24.86,11.56 24.86,13.02 25.75,13.91 25.75,14.1 25.81,14.23 | 25.02,7.4 24.86,7.24 24.6,7.24 IC3.10 | 30.7,12 29.94,12 29.11,12.83 29.11,12.89 U1.P$AD14 | 30.7,12 31.59,12.89 U1.P$AD23 | 30.7,12 30.76,11.88 31.21,11.43 31.21,8.96 C7.1 31.21,8.77 v31.21,7.81 | 23.08,6.61 23.08,7.18 IC3.7 22.95,7.24 22.76,7.24 20.22,9.78 v19.84,9.78 | 23.08,6.61 23.33,6.35 C19.1 | 29.94,4.13 30.25,4.13 IC9.E3 | 29.94,4.13 IC9.E2 | v29.87,3.62 29.87,4 29.94,4.13 | v27.52,4.38 27.52,3.81 27.33,3.62 C33.1 27.27,3.5 27.14,3.37 27.14,2.35 C25.1 | v24.03,8 23.59,8.45 23.59,8.7 IC3.3 | v22.89,6.61 23.08,6.61 | v25.11,7.24 25.11,7.31 25.02,7.4 | v34.38,7.75 35.15,7.75
  Bottom 0.3: v33.37,26.1 v33.37,20.7 33.49,20.64 37.18,16.96 v37.18,13.66 | v24.73,20.89 v20.03,20.89 20.03,20.77 19.59,20.32 19.08,20.32 18.82,20.58 18.82,21.09 18.95,21.21 18.95,22.67 v18.76,22.86 | v31.59,20.13 29.87,20.13 28.54,21.47 27.91,21.47 26.06,23.31 25.56,23.31 24.79,22.55 24.79,21.02 v24.73,20.89 | v10.32,6.16 12.98,6.16 v15.71,8.89 15.84,8.96 16.48,8.96 18,10.48 19.14,10.48 v19.84,9.78 | v29.87,3.62 28.29,3.62 27.94,3.97 | 27.94,3.97 v27.52,4.38 27.52,4.51 24.95,7.08 | 24.95,7.08 v24.03,8 24.1,7.81 v22.89,6.61 | 27.94,3.97 28.48,4.51 28.48,4.7 31.21,7.43 v31.21,7.81 31.33,7.75 v34.38,7.75 | v25.11,7.24 24.95,7.08 | v25.05,14.54 25.05,15.12 24.79,15.37 24.79,20.77 v24.73,20.89
ALERT  (1 unrouted)
D+  (via drill 0.3)
  Top 0.127: v30.7,11.05 28.92,11.05 27.08,12.89 U1.P$AD6 | v33.3,11.05 33.3,11.31 33.87,11.88 v33.87,14.86 | v23.4,23.75 21.62,25.53 21.62,26.42 21.11,26.93 20.86,26.93 D3.4
  Bottom 0.127: v33.3,11.05 v30.7,11.05 | v33.87,14.86 33.87,16.64 32.03,18.48 32.03,20.32 30.51,21.85 28.03,21.85 26.13,23.75 v23.4,23.75
D-  (via drill 0.3)
  Top 0.127: v25.68,11.94 26.13,11.94 26.51,12.32 26.51,12.89 U1.P$AD4 | v19.84,24.9 20.67,24.9 20.79,25.02 D3.6
  Bottom 0.127: v25.68,11.94 25.68,12.13 23.33,14.48 23.33,15.18 18.19,20.32 18.19,21.97 18,22.16 18,23.05 v19.84,24.9
DN
  Top 0.127: J4.A7 23.27,28.83 23.27,29.34 23.52,29.59 23.97,29.59 24.22,29.34 24.22,28.83 J4.B7 24.22,28.77 24.22,25.72 23.59,25.09 23.33,25.09 D3.1
DP
  Top 0.127: 22.76,28.01 22.76,27.5 23.27,26.99 D3.3 | 22.76,28.01 22.76,28.77 J4.B6 | 22.76,28.01 23.52,28.01 23.71,28.2 23.71,28.77 J4.A6
EPD_3V3  (via drill 0.3)
  Top 0.127: 9.08,14.64 10.06,15.62 10.44,15.62 503480-2400.16 10.44,15.69 10.44,16.13 503480-2400.15 | 9.08,14.64 8.67,14.23 8.67,13.85 EPD_C5.2 | C1-EP-DR.1 12.35,20.26 12.35,17.53 11.84,17.02 L5.2 11.84,16.96 12.67,16.13 v12.67,14.8 | v16.79,10.67 16.79,9.66 DMG2305UX-7.3 | v9.11,14.61 9.08,14.64
  Bottom 0.127: v16.79,10.67 v12.67,14.8 12.67,14.74 12.16,14.23 9.49,14.23 v9.11,14.61
EPD_BUSY  (via drill 0.3)
  Top 0.127: v29.94,11.5 28.73,12.7 28.73,12.77 28.6,12.89 U1.P$AD12 | v30.89,30.74 v39.34,22.29 | v9.3,20.01 10.12,19.18 10.44,19.18 503480-2400.9
  Bottom 0.127: v29.94,11.5 37.69,11.5 39.15,12.96 39.15,22.1 v39.34,22.29 | v30.89,30.74 28.86,30.74 27.91,31.69 16.98,31.69 8.98,23.69 8.98,20.32 v9.3,20.01
EPD_CS  (1 unrouted)
EPD_DC  (via drill 0.3)
  Top 0.127: v28.98,11.81 28.1,12.7 28.1,12.89 U1.P$AD10 | v34.32,13.72 v34.32,12.26 | v35.53,14.93 36.35,14.93 36.86,15.43 38.51,15.43 40.03,16.96 40.03,18.23 32.03,26.23 31.97,26.23 30.95,27.25 30.95,28.51 v29.18,30.29 | v9.74,18.55 10.12,18.16 10.44,18.16 503480-2400.11
  Bottom 0.127: v28.98,11.81 29.62,11.81 29.87,12.07 34.13,12.07 v34.32,12.26 | v35.53,14.93 v34.32,13.72 | v29.18,30.29 28.92,30.29 27.78,31.44 17.11,31.44 9.24,23.56 9.24,20.7 9.74,20.2 v9.74,18.55
EPD_RST  (1 unrouted)
GDR
  Top 0.127: 10.03,22.58 10.06,22.61 10.38,22.61 503480-2400.2 | 10.03,22.58 8.28,20.83 8.28,20.32 8.41,20.2 8.47,20.2 8.67,20.01 R2_EP_DR.2 | 10.03,22.58 9.87,22.74 9.87,27.69 13.05,30.86 15.27,30.86 15.52,30.61 15.52,29.47 16.29,28.71 16.29,26.55 16.03,26.29 15.14,26.29 14.76,26.67 Q3.1
GND  (via drill 0.3)
  Top 0.127: SW_DN.1 35.21,4 39.91,4 41.05,5.15 41.05,6.67 41.88,7.5 J2.3 41.94,7.56 43.15,7.56 J2.5 43.21,7.56 43.72,7.56 44.54,8.38 44.8,8.38 45.3,8.89 45.3,10.48 41.24,14.54 41.24,14.8 39.75,16.29 | C24.1 33.68,7.62 33.68,9.91 36.03,12.26 C8.2 36.16,12.19 36.03,12.32 36.03,14.29 C9.2 36.1,14.29 36.99,15.18 38.64,15.18 39.75,16.29 | 40.29,25.85 40.22,25.85 39.15,26.93 38.57,26.93 38.38,26.74 C22.2 38.32,26.74 37.11,27.94 36.6,27.94 C3.2 36.54,28.01 36.54,28.13 33.49,31.18 27.84,31.18 | 40.29,25.85 42.51,25.85 42.64,25.97 42.64,26.42 42.38,26.67 42.26,26.67 C4.2 | v28.35,23.18 27.33,22.16 27.21,22.16 C15.2 | J4.A1_B12 26.76,28.83 27.27,28.83 27.78,29.34 J4.SH3 27.84,29.4 27.84,31.18 | 27.84,31.18 27.84,33.47 J4.SH1 | 39.75,16.29 40.29,16.83 40.29,25.85 | 27.02,18.04 27.27,18.29 27.27,18.93 U1.P$B7 | U1.P$F23 31.52,17.72 30.89,17.72 30.64,17.97 U1.P$74 | 30.64,18.04 31.84,19.24 32.16,19.24 32.29,19.12 32.6,19.12 C1.2 32.67,19.05 35.21,19.05 36.73,17.53 X1.4 36.8,17.47 36.99,17.47 38.13,16.32 X1.2 | U1.P$74 27.02,15.56 27.02,14.42 U1.P$87 27.08,14.42 28.16,14.42 U1.P$88 | U1.P$83 27.02,15.62 U1.P$74 | U1.P$79 27.02,16.83 27.59,17.4 U1.P$74 | 27.02,18.04 U1.P$75 26.95,18.04 26.76,18.04 26,18.8 26,20.7 26.06,20.77 26.06,21.53 25.49,22.1 C14.2 | 27.02,18.04 U1.P$74 | U1.P$84 28.22,15.62 28.22,15.94 U1.P$74 | U1.P$80 28.22,16.83 U1.P$74 | U1.P$74 29.43,15.56 29.43,14.42 U1.P$89 29.49,14.42 30.57,14.42 U1.P$90 | U1.P$74 29.43,15.62 U1.P$85 29.49,15.62 30.57,15.62 U1.P$86 | U1.P$81 29.43,16.83 U1.P$74 | U1.P$76 28.16,17.97 27.65,17.47 U1.P$74 | U1.P$77 29.43,17.97 30,17.4 U1.P$74
  Top 0.127: U1.P$82 30.57,16.83 30.06,17.34 U1.P$74 | 30.64,18.04 U1.P$78 | 30.64,18.04 U1.P$74 | C16.2 29.05,20.7 29.94,20.7 C13.2 29.94,20.64 30.95,20.64 C12.2 31.02,20.64 31.78,20.64 32.29,21.15 35.97,21.15 38,19.12 38,18.99 C2.2 38.07,18.93 38.95,18.04 38.95,17.02 38.26,16.32 X1.2 | C10.2 33.37,16.32 33.37,17.28 C11.2 33.43,17.28 34,17.28 34.06,17.34 34.57,17.34 36.22,15.69 37.56,15.69 38.19,16.32 X1.2 | 31.75,7.59 31.71,7.62 31.71,8.89 C7.2 | 31.75,7.59 32.48,6.86 32.48,5.91 C29.1 | 30.41,7.97 31.02,7.37 31.52,7.37 31.75,7.59 | 30.41,7.97 30.38,8 30.38,8.58 C20.2 | C25.2 26.13,2.35 26.13,3.43 26.25,3.56 C33.2 26.13,3.5 25.68,3.94 v25.37,3.94 24.67,3.94 SW_ENT.1 | IC3.8 23.59,7.18 24.03,7.18 IC3.9 24.03,7.12 24.03,6.48 | v22.7,5.53 22.76,5.46 23.4,5.46 C31.1 | 24.03,6.48 v24.41,6.48 26.45,6.48 26.51,6.54 27.21,6.54 | 24.03,6.48 23.91,6.35 C19.2 24.03,6.48 | IC9.C3 30.25,4.96 29.94,4.96 IC9.C2 29.87,4.96 29.56,4.96 IC9.C1 29.49,4.96 29.49,5.27 IC9.B1 29.43,5.34 29.24,5.34 28.67,5.91 27.21,5.91 | 27.21,6.54 27.21,7.5 27.52,7.81 C21.2 | 27.21,6.54 27.21,5.91 | 27.21,5.91 27.21,5.46 C23.2 | C6.2 26.83,10.61 26.83,8.58 27.52,7.88 C21.2 | 30.41,7.97 30.38,7.94 27.52,7.94 C21.2 | 22.06,22.61 21.05,22.61 21.02,22.58 | IC2.B3 21.02,22.58 | 22.06,22.61 C32.1 | R1_USB.1 26.13,25.4 26.13,25.21 25.37,24.45 25.37,22.23 25.43,22.16 C14.2 | 24.32,21.12 25.37,22.16 C14.2 | 24.32,21.12 24.29,21.09 24.29,20.26 C5.2 | 22.86,21.75 23.46,21.15 24.29,21.15 24.32,21.12 | 22.86,21.75 22.06,22.55 22.06,22.61 | 24.25,18.07 24.35,17.97 C18.1 | 24.25,18.07 24.22,18.1 C17.1 | 22.09,15.09 22.25,15.24 22.25,15.37 C37.1 22.25,15.43 22.25,16 21.05,17.21 21.05,17.4 C27.1 21.05,17.47 21.59,18.01
  Top 0.127: 22.09,15.09 21.11,14.1 21.11,13.97 IC1.D2 | 22.09,15.09 22.7,14.48 23.21,14.48 23.78,13.91 23.78,13.47 23.46,13.15 R9.1 23.4,13.08 23.14,13.08 21.75,11.69 21.75,11.24 22.16,10.83 | 21.59,18.01 21.62,18.04 24.22,18.04 24.25,18.07 | U3.6 17.36,14.61 18.13,14.61 18.32,14.42 U3.9 | U3.9 18.32,14.35 18.95,13.72 19.27,13.72 U3.1 19.33,13.08 20.03,12.39 20.03,10.23 | U3.4 19.27,15.12 18.95,15.12 18.32,14.48 U3.9 | 20.03,10.23 19.65,10.23 19.02,9.59 C39.2 | 20.03,10.23 20.48,10.23 C38.1 20.54,10.23 21.43,10.23 | 22.16,10.83 21.55,10.23 21.43,10.23 | 22.16,10.83 22.45,11.12 23.71,11.12 R3.2 | 22.86,21.75 21.55,20.45 21.55,18.04 21.59,18.01 | 21.43,10.23 v21.43,10.1 | 2.03,6.96 2,6.92 2,4.51 3.27,3.24 D4.1 | 2.03,6.96 2.19,7.12 3.46,7.12 6.63,3.94 8.47,3.94 C30.1 | TP_BAT_GND.TP 5.81,31.69 5.81,29.21 4.28,27.69 TP_GND.TP 4.28,27.63 7.78,24.13 7.78,23.94 503480-2400.MP1 7.78,23.88 7.78,19.12 8.03,18.86 8.03,13.85 EPD_C5.1 8.03,13.78 8.03,10.99 7.9,10.86 503480-2400.MP2 7.84,10.86 7.2,10.23 5.55,10.23 | 5.55,10.23 2.25,10.23 0.85,8.83 0.85,7.94 1.81,6.99 2,6.99 2.03,6.96 | EPD_C12.1 7.9,9.59 7.33,9.02 7.33,8.26 7.52,8.07 8.35,8.07 9.17,8.89 9.17,9.27 9.68,9.78 EPD_C11.1 9.74,9.85 9.87,9.97 10.44,9.97 | 10.44,9.97 10.95,9.97 EPD_C10.1 | EPD_C8.1 13.87,11.18 12.79,10.1 12.79,9.91 EPD_C9.1 12.73,9.85 11.4,8.51 10.57,8.51 10.47,8.61 | EPD_C7.1 12.79,12.26 13.24,11.81 13.3,11.81 13.87,11.24 EPD_C8.1 | 14.16,12.86 14.25,12.77 14.25,11.81 13.81,11.37 EPD_C8.1 | 14.16,12.86 14.13,12.89 13.55,12.89 13.3,13.15 13.24,13.15 12.79,13.59 EPD_C6.1 | SW_UP.1 13.36,4 13.36,5.78 12.67,6.48 12.67,7.88 14.32,9.53 14.32,10.29 13.68,10.93 EPD_C8.1
  Top 0.127: 10.44,9.97 10.44,8.64 10.47,8.61 | 12.16,22.16 13.24,22.16 13.74,21.66 EPD_C2.1 13.81,21.59 14.32,21.09 14.32,20.2 14.25,20.13 | 12.16,22.16 11.9,22.16 11.4,21.66 EPD_C1.1 | R2_EP_DR.1 8.73,20.51 9.43,20.51 9.87,20.07 9.87,19.94 10.12,19.69 10.44,19.69 503480-2400.8 | 10.76,19.62 11.02,19.37 11.02,15.37 10.82,15.18 10.51,15.18 503480-2400.17 | 10.76,19.62 10.51,19.62 503480-2400.8 | 10.76,19.62 11.4,20.26 C1-EP-DR.2 11.46,20.32 12.03,20.89 12.73,20.89 12.92,20.7 12.92,20.51 13.3,20.13 14.25,20.13 | 10.76,19.62 503480-2400.8 | IC2.B1 19.27,21.78 17.62,21.78 17.05,21.21 16.79,21.21 C34.1 16.73,21.21 16.6,21.21 15.78,22.04 15.78,24.83 | 19.27,26.04 19.52,26.29 19.52,26.42 R2_USB.2 | 19.27,26.04 18.82,26.04 18.22,26.64 | 18.22,26.64 C43.2 17.81,26.99 15.78,24.96 15.78,24.83 | 15.05,29.56 15.02,29.59 13.62,29.59 12.86,28.83 12.86,28.64 SJ1.1 | 15.05,29.56 16.03,28.58 16.03,26.67 15.9,26.55 15.46,26.55 15.33,26.67 15.33,26.74 R_TYPE_SEL.1 | v17.17,29.85 16.29,29.85 16.03,29.59 16.03,29.47 C42.1 | 19.68,28.86 19.21,29.34 J4.SH4 19.21,29.4 19.21,33.47 J4.SH2 | 19.68,28.86 19.71,28.83 20.29,28.83 J4.A12_B1 | v22.06,26.48 22.51,26.04 23.27,26.04 D3.2 | v15.08,30.42 15.08,29.59 15.05,29.56 | 18.22,26.64 19.65,28.07 19.65,28.83 19.68,28.86 | 12.16,22.16 12.16,24.13 12.86,24.83 15.78,24.83 | 14.25,20.13 14.25,13.15 14.19,13.08 14.19,12.89 14.16,12.86 | 5.55,10.23 5.55,5.97 5.62,5.91 7.58,5.91 9.94,8.26 10.12,8.26 10.47,8.61 | 19.27,26.04 19.27,24.83 20.98,23.12 20.98,22.61 21.02,22.58
  Bottom 0.127: 28.35,26.48 28.35,28.83 27.84,29.34 J4.SH3 | 28.35,26.48 v28.35,23.18 | v24.41,6.48 23.62,5.69 | 23.62,5.69 23.46,5.53 v22.7,5.53 22.7,5.08 22.06,4.45 21.68,4.45 21.43,4.7 v21.43,10.1 | 23.62,5.69 v25.37,3.94 | v17.17,29.85 18.7,29.85 19.14,29.4 J4.SH4 19.21,29.34 v22.06,26.48 28.35,26.48 | v15.08,30.42 15.33,30.42 18.38,33.47 19.14,33.47 J4.SH2
  pour Top: -2.29,-2.82 52.15,-2.82 52.6,-2.37 52.6,35.07 50.15,37.52 -2.81,37.52 -2.81,37.52 -2.82,37.52 -2.84,37.52 -2.84,37.52 -2.84,37.53 -2.85,37.53 -2.86,37.54 -2.87,37.54 -3.74,37.98 -3.74,-1.37
  pour Bottom: 50.6,36.57 49.65,37.52 -2.34,37.52 -2.36,37.54 -2.74,37.92 -2.74,-0.87 -1.79,-1.82 50.6,-1.82
HAPTIC_EN  (via drill 0.3)
  Top 0.127: v24.41,14.99 25.56,14.99 U1.P$U1 | v18.44,22.36 19.27,22.36 IC2.A1
  Bottom 0.127: v24.41,14.99 23.91,14.99 18.44,20.45 v18.44,22.36
IMU_INT1  (via drill 0.3)
  Top 0.127: v22.19,11.5 22.38,11.5 24.03,13.15 24.03,14.04 23.97,14.1 23.97,15.18 24.67,15.88 25.56,15.88 U1.P$N1 | v22.51,10.48 22.51,8.64 22.89,8.26 23.02,8.26 IC3.5
  Bottom 0.127: v22.19,11.5 22.19,10.8 v22.51,10.48
IMU_INT2  (1 unrouted)
LX1  (via drill 0.3)
  Top 0.127: IC9.B2 29.94,5.34 30.25,5.34 IC9.B3 30.32,5.27 30.38,5.27 31.14,4.51 v31.14,3.62 | v29.24,1.72 28.6,1.72 28.29,1.4 L7.1
  Bottom 0.127: v29.24,1.72 v31.14,3.62
LX2
  Top 0.127: IC9.D2 29.94,4.51 30.25,4.51 IC9.D3 30.32,4.51 30.45,4.51 30.7,4.26 30.7,1.78 30.32,1.4 L7.2
MOSI  (1 unrouted)
N$2  (via drill 0.3)
  Top 0.127: v31.59,16.2 31.59,17.15 U1.P$H23 | v38.89,24.96 36.1,27.75 36.1,27.94 C3.1 | v38.57,27.37 40.03,28.83 L1.1
  Bottom 0.127: v31.59,16.2 31.59,14.35 32.98,12.96 38.38,12.96 38.89,13.47 v38.89,24.96 38.51,25.34 38.51,26.67 38.57,26.74 v38.57,27.37
N$3  (via drill 0.3)
  Top 0.127: v28.98,4.45 29.05,4.51 29.43,4.51 IC9.D1 | v35.65,8.38 36.67,9.4 v36.67,14.23 | v35.4,15.69 34.83,15.69 R4.2
  Bottom 0.127: v28.98,4.45 31.71,4.45 v35.65,8.38 | v36.67,14.23 36.67,14.42 v35.4,15.69
N$4
  Top 0.127: IC1.D1 21.49,13.91 23.21,13.91 23.4,13.72 R9.2
N$5
  Top 0.127: U1.P$N24 32.1,15.88 33.49,15.88 35.02,14.35 35.46,14.35 C9.1
N$6
  Top 0.127: IC9.E1 29.43,4.07 29.43,3.75 28.98,3.31 R2.2
N$7  (via drill 0.3)
  Top 0.127: v38.95,26.48 38.7,26.23 38.38,26.23 C22.1 | v39.65,27.18 39.65,27.44 40.03,27.82 L1.2 | C4.1 42.19,26.23 41.69,26.23 40.1,27.82 L1.2 | L1.2 40.05,28.02 40.54,28.51 40.54,31.38 ANT1.1
  Bottom 0.127: v39.65,27.18 v38.95,26.48
N$8
  Top 0.127: U1.P$D23 31.59,18.23 32.22,18.23 32.8,17.66 32.8,17.34 C11.1
N$9
  Top 0.127: R3.1 23.78,11.69 23.97,11.5 24.03,11.5 24.54,10.99 24.54,8.77 IC3.1
N$10
  Top 0.127: L3.1 30.19,23.88 29.56,23.88 28.6,24.83 L2.2
N$11
  Top 0.127: U1.P$AC5 26.76,13.4 26.19,13.4 26.13,13.34 25.87,13.34 25.24,12.7 25.24,11.75 25.49,11.5 26.76,11.5 27.21,11.94 27.59,11.94 29.3,10.23 29.3,8.64 C20.1
N$12
  Top 0.127: U1.P$C1 25.56,18.48 25.49,18.48 25.11,18.86 25.11,19.05 24.48,19.69 24.35,19.69 C5.1
N$13
  Top 0.127: U1.P$D2 26,18.16 25.75,18.16 25.68,18.1 25.43,18.1 C17.2 24.67,18.86 24.67,18.99 24.29,19.37 23.14,19.37 22.7,19.81 X2.1
N$14
  Top 0.127: U1.P$F2 26,17.72 25.68,17.72 25.56,17.85 24.98,17.85 24.92,17.91 C18.2 24.92,17.85 24.41,17.34 22.7,17.34 X2.2
N$15
  Top 0.127: U1.P$B24 32.1,18.93 32.41,18.61 32.6,18.61 C1.1 32.67,18.55 34.51,18.55 36.73,16.32 X1.1
N$17
  Top 0.127: U1.P$A23 31.59,19.43 31.65,19.43 31.71,19.5 36.99,19.5 37.49,18.99 C2.1 37.56,18.93 37.56,18.74 38.19,18.1 38.19,17.53 X1.3
N$18  (via drill 0.3)
  Top 0.127: 26.83,20.39 26.83,20.77 27.14,21.09 C15.1 | 26.83,20.39 26.83,18.99 U1.P$B5 | 32.1,17.47 32.1,17.34 32.86,16.58 32.86,16.32 C10.1 | 32.1,17.47 32.1,17.91 U1.P$E24 | 28.7,20.42 28.6,20.51 28.6,21.4 30.76,23.56 30.76,24.32 30.25,24.83 L3.2 | 28.7,20.42 28.86,20.26 28.98,20.26 C16.1 | v32.03,17.47 32.1,17.47 | v28.41,20.39 28.67,20.39 28.7,20.42 | v27.52,20.39 26.83,20.39
  Bottom 0.127: v32.03,17.47 29.11,20.39 v28.41,20.39 v27.52,20.39
N$19
  Top 0.127: U1.P$A18 30,19.43 30,20.2 C13.1
N$20
  Top 0.127: U1.P$B3 26.32,18.99 26.32,22.23 26.83,22.74 27.27,22.74 28.35,23.82 28.54,23.82 L2.1
N$22  (via drill 0.3)
  Top 0.127: v9.87,3.69 8.92,2.73 C2-EP-DR.2 | v13.81,5.21 13.81,6.61 D5.2 13.49,6.99 13.49,8.32 15.27,10.1 15.27,15.88 16.35,16.96 L5.1 16.35,17.02 v15.59,17.78 | v14.13,25.28 14.13,25.97 Q3.3
  Bottom 0.127: v9.87,3.69 12.28,3.69 v13.81,5.21 | v14.13,25.28 14.13,19.24 v15.59,17.78
N$23
  Top 0.127: C2-EP-DR.1 8.86,1.78 8.22,1.78 6.82,3.18 D4.2 6.76,3.24 3.52,6.48 2.89,6.48 D2.1
N$24
  Top 0.127: R_TYPE_SEL.2 15.65,26.99 15.65,27.31 14.38,28.58 SJ1.2 14.38,28.51 13.43,27.56 12.16,27.56 12.03,27.69 10.51,27.69 R1_EP_DR.1
N$26
  Top 0.127: 503480-2400.5 10.44,21.09 10.95,21.09 11.02,21.02 11.78,21.02 12.35,21.59 EPD_C1.2
N$27  (via drill 0.3)
  Top 0.127: v9.68,21.59 10.38,21.59 503480-2400.4 | v13.05,21.34 13.74,20.64 EPD_C2.2
  Bottom 0.127: v9.68,21.59 12.79,21.59 v13.05,21.34
N$28  (via drill 0.3)
  Top 0.127: v9.74,14.67 10.44,14.67 503480-2400.18 | v13.74,14.35 13.74,13.66 EPD_C6.2
  Bottom 0.127: v9.74,14.67 11.9,14.67 12.47,15.24 12.86,15.24 v13.74,14.35
N$29  (via drill 0.3)
  Top 0.127: v21.43,23.05 22.25,23.05 22.45,22.86 22.45,22.67 C32.2 | v20.22,22.86 20.22,22.74 19.84,22.36 IC2.A2
  Bottom 0.127: v21.43,23.05 20.41,23.05 v20.22,22.86
N$30
  Top 0.127: 503480-2400.19 10.51,14.1 11.33,14.1 12.54,12.89 13.17,12.89 13.74,12.32 EPD_C7.2
N$31
  Top 0.127: 503480-2400.20 10.51,13.59 10.82,13.59 12.22,12.19 12.22,11.88 12.86,11.24 EPD_C8.2
N$33
  Top 0.127: 503480-2400.22 10.51,12.64 10.82,12.64 11.59,11.88 11.59,9.66 11.02,9.08 EPD_C10.2
N$35
  Top 0.127: EPD_C12.2 7.97,8.64 9.17,9.85 9.17,10.35 10.44,11.62 503480-2400.24
N$37
  Top 0.127: R1_USB.2 26.7,25.47 26.7,26.36 24.79,28.26 24.79,28.77 J4.A5
N$40
  Top 0.127: R2_USB.1 19.08,26.48 19.27,26.67 19.27,26.74 20.54,28.01 21.49,28.01 21.75,28.26 21.75,28.77 J4.B5
OUT+
  Top 0.127: IC2.A3 20.29,22.36 20.35,22.36 20.67,22.67 20.67,23.05 18.7,25.02 17.62,25.02 TP_OP.TP
OUT-
  Top 0.127: IC2.C3 20.48,21.15 20.48,20.7 20.16,20.39 16.54,20.39 13.36,23.56 TP_ON.TP
P0.13  (via drill 0.3)
  Top 0.127: C30.2 8.86,4.45 9.36,4.96 R5.1 9.43,4.96 10.38,4 10.57,4 SW_UP.2 10.63,3.94 v11.4,3.18 | v27.33,13.4 27.52,13.21 27.52,12.96 U1.P$AD8 | v28.86,10.04 v27.4,11.5
  Bottom 0.127: v27.33,13.4 27.33,11.56 v27.4,11.5 | v28.86,10.04 31.84,10.04 33.05,8.83 35.84,8.83 36.1,8.58 36.1,8.19 31.97,4.07 30.95,4.07 30.06,3.18 25.87,3.18 25.68,3.37 11.59,3.37 v11.4,3.18
P0.14  (via drill 0.3)  (1 unrouted)
  Top 0.127: v24.86,5.66 24.67,5.46 23.84,5.46 C31.2 | v21.87,4.89 21.87,4 SW_ENT.2 | v33.43,19.94 32.8,19.94 32.48,20.26 32.48,20.32 32.29,20.51 R8.1 | v34.32,14.35 34.76,13.91 34.76,11.88 v33.94,11.05
  Bottom 0.127: v24.86,5.66 24.86,6.67 24.6,6.92 23.84,6.92 22.89,5.97 22.51,5.97 22.48,5.94 | 22.48,5.94 21.87,5.34 v21.87,4.89 | v33.43,19.94 33.43,19.69 34.7,18.42 34.7,14.74 v34.32,14.35 | v33.94,11.05 33.43,10.54 28.48,10.54 26.38,8.45 23.84,8.45 22.45,7.05 22.45,5.97 22.48,5.94
P1.01  (via drill 0.3)
  Top 0.127: v32.41,10.1 32.41,12.58 31.59,13.4 31.59,14.16 U1.P$Y23 | v16.29,24.64 16.29,24.26 16.16,24.13 R_PWR_EPD.1 | v17.75,13.15 17.75,11.75 DMG2305UX-7.1
  Bottom 0.127: v32.41,10.1 37.88,10.1 38.95,9.02 41.05,9.02 41.18,8.89 42.89,8.89 44.1,10.1 44.1,23.37 37.62,29.85 28.98,29.85 27.65,31.18 17.24,31.18 16.29,30.23 v16.29,24.64 16.29,16.89 17.75,15.43 v17.75,13.15
P1.02
  Top 0.127: 33.14,6.13 32.92,5.91 C29.2 32.86,5.85 32.86,5.72 32.41,5.27 32.41,4 SW_DN.2 | 33.14,6.13 33.18,6.16 33.18,8.07 32.86,8.38 32.86,11.24 33.62,12 33.62,13.59 32.8,14.42 32.1,14.42 U1.P$W24 | 33.14,6.13 33.81,5.46 34.64,5.46 R7.1
PMIC_INT  (1 unrouted)
PREVGH  (via drill 0.3)
  Top 0.127: 13.02,9.12 10.89,6.99 10,6.99 D5.1 | 13.02,9.12 13.74,9.85 EPD_C9.2 | v12.09,10.04 11.97,10.16 11.97,11.94 10.82,13.08 10.51,13.08 503480-2400.21 | v12.98,9.15 13.02,9.12
  Bottom 0.127: v12.98,9.15 v12.09,10.04
PREVGL
  Top 0.127: 7.93,7.27 7.2,6.54 6.38,6.54 D2.2 | 7.93,7.27 9.43,8.77 9.68,8.77 EPD_C11.2 | 7.93,7.27 7.08,8.13 7.08,9.72 7.52,10.16 8.09,10.16 10.06,12.13 10.44,12.13 503480-2400.23
RESE
  Top 0.127: R1_EP_DR.2 10.51,27.12 10.51,26.8 11.9,25.4 Q3.2 11.9,25.34 11.9,23.31 10.76,22.16 10.44,22.16 503480-2400.3
RESET  (via drill 0.3)  (1 unrouted)
  Top 0.127: v42.7,12.45 42.95,12.45 44.1,11.31 44.1,10.1 43.21,9.21 J2.6 | v39.59,18.04 30.38,27.25 29.75,27.25 TP_RESET.TP
  Bottom 0.127: v42.7,12.45 42.7,14.93 v39.59,18.04
SCK  (via drill 0.3)
  Top 0.127: v28.35,22.55 27.97,22.16 27.97,20.2 28.54,19.62 28.54,19.43 U1.P$A12 | v17.62,29.34 17.62,30.04 16.54,31.12 12.92,31.12 8.47,26.67 8.47,21.4 8.03,20.96 8.03,19.24 10.12,17.15 10.44,17.15 503480-2400.13
  Bottom 0.127: v28.35,22.55 28.1,22.55 24.6,26.04 20.92,26.04 v17.62,29.34
SCL  (via drill 0.3)  (1 unrouted)
  Top 0.127: TP_SCL.TP 17.05,2.16 18,3.11 18,3.62 R17.2 18.06,3.69 18.25,3.88 18.32,3.88 18.44,4 18.44,6.86 16.22,9.08 16.22,10.93 16.6,11.31 v16.6,13.66 16.73,13.78 16.73,13.85 16.98,14.1 17.3,14.1 U3.7 | v21.05,11.75 21.05,11.88 21.81,12.64 21.81,12.83 21.55,13.08 21.49,13.08 IC1.B1 | v17.3,20.83 17.81,21.34 IC2.C1 19.33,21.34 v19.33,20.83 | v24.98,9.34 24.98,8.51 24.73,8.26 24.6,8.26 IC3.12 | v34.26,16.89 34.26,15.75 R4.1
  Bottom 0.127: v16.6,13.66 17.78,12.48 | 17.78,12.48 18.51,11.75 v21.05,11.75 21.24,11.94 22.38,11.94 v24.98,9.34 | v17.3,20.83 17.3,16.26 18.19,15.37 18.19,12.89 17.78,12.48 | v34.26,16.89 34.26,18.48 30.64,22.1 28.16,22.1 26.06,24.2 23.21,24.2 20.35,21.34 19.84,21.34 v19.33,20.83
SDA  (via drill 0.3)  (1 unrouted)
  Top 0.127: v27.97,4.83 27.97,3.69 28.92,2.73 R2.1 | v26.7,6.1 24.67,6.1 24.48,5.91 22.95,5.91 19.84,9.02 v19.65,9.02 18.57,9.02 17.24,10.35 17.24,11.12 17.17,11.18 17.17,13.53 17.3,13.66 U3.8 | TP_SDA.TP 2.12,8.38 2.57,8.38 5.3,5.66 R18.2 v9.36,5.66 | v22.89,14.93 23.33,14.93 24.79,16.39 25.56,16.39 U1.P$L1 | IC1.C1 21.49,13.47 v21.94,13.47 22.06,13.34 22.06,12.51 21.49,11.94 v21.49,10.86 | v22.95,9.97 24.03,8.89 24.03,8.77 IC3.2
  Bottom 0.127: v26.7,6.1 v27.97,4.83 | v21.94,13.47 21.94,13.97 v22.89,14.93 | v22.95,9.97 22.38,9.97 v21.49,10.86 21.49,10.8 19.68,8.99 | v9.36,5.66 16.35,5.66 19.68,8.99 | v19.65,9.02 19.68,8.99
SWDCLK  (via drill 0.3)
  Top 0.127: v32.6,13.97 32.1,13.97 U1.P$AA24 | v39.72,12.51 v38.07,12.51 | v41.37,9.34 41.88,8.83 J2.4 | v42.26,14.16 44.67,14.16 TP_SWDCLK.TP
  Bottom 0.127: v32.6,13.97 32.6,15.81 31.78,16.64 31.4,16.64 31.14,16.39 31.14,15.94 31.33,15.75 31.33,14.23 32.86,12.7 37.88,12.7 v38.07,12.51 | 40.16,12.07 41.05,11.18 41.05,9.66 v41.37,9.34 | 40.16,12.07 v39.72,12.51 | 40.16,12.07 v42.26,14.16
SWDIO  (via drill 0.3)
  Top 0.127: v33.18,13.4 32.1,13.4 U1.P$AC24 | v38.45,13.66 39.53,13.66 40.03,14.16 TP_SWDIO.TP 39.59,13.66 40.92,12.32 40.92,10.16 40.67,9.91 J2.2
  Bottom 0.127: v33.18,13.4 34,13.4 34.19,13.21 38,13.21 v38.45,13.66
SWO  (via drill 0.3)
  Top 0.127: v30.32,12.51 30.64,12.51 31.02,12.89 U1.P$AD22 | v25.81,22.8 25.81,23.12 26.57,23.88 TP_SWO.TP
  Bottom 0.127: v30.32,12.51 29.05,12.51 27.59,11.05 27.21,11.05 26.64,11.62 26.64,13.91 25.81,14.74 v25.81,22.8
VBAT
  Top 0.3: 20.38,13.94 20.22,14.1 19.33,14.1 U3.2 19.33,14.29 19.33,14.61 U3.3 | 20.38,13.94 20.79,13.53 21.05,13.53 IC1.C2 | 20.38,13.94 21.81,15.37 C37.2 21.81,15.56 21.81,15.94 20.6,17.15 20.6,17.34 C27.2 20.6,17.47 18.63,17.47 18.51,17.59 TP_VBAT.TP
VBUS  (via drill 0.3)
  Top 0.3: 21.71,29.88 21.81,29.97 25.24,29.97 25.87,29.34 25.87,28.83 J4.A4_B9 | 21.71,29.88 21.17,29.34 21.17,28.83 J4.A9_B4 | C42.2 16.48,29.4 17.75,28.13 C43.1 17.87,28.07 v18.44,27.5 | 20.82,12.29 20.54,12 20.54,10.67 C38.2 | 20.82,12.29 21.05,12.51 21.05,12.7 IC1.A2 | v26,12.45 26,12.89 U1.P$AD2 | v26.25,8.96 26.25,8.13 26.51,7.88 C21.1 | v20.79,12.32 20.82,12.29 | v19.71,25.53 20.16,25.97 20.79,25.97 D3.5 | 21.71,29.88 20.86,30.74 v19.65,30.74
  Bottom 0.3: v26,12.45 26.25,12.19 26.25,11.43 | v26.25,8.96 26.25,11.43 | 26.25,11.43 25.43,11.43 24.54,12.32 v20.79,12.32 20.98,12.45 20.98,13.34 17.81,16.51 17.81,21.09 17.62,21.28 17.62,23.44 v19.71,25.53 19.65,25.66 18.44,26.86 v18.44,27.5 18.38,27.63 16.67,29.34 16.67,30.1 17.3,30.74 v19.65,30.74
VREG  (via drill 0.3)
  Top 0.127: v20.48,13.08 21.05,13.08 IC1.B2 | v19.59,12.19 19.59,11.18 19.02,10.61 C39.1 18.95,10.54 18.82,10.54 v18.25,9.97 | IC9.A3 30.25,5.72 29.94,5.72 IC9.A2 29.87,5.72 IC9.A1 29.43,5.78 v29.11,6.1 | 21.65,5.31 19.14,2.8 19.14,1.34 TP_VREG.TP | 21.65,5.31 21.68,5.34 22.06,5.34 22.32,5.08 27.33,5.08 27.52,5.27 27.52,5.4 C23.1 27.59,5.46 v28.48,5.46 | C24.2 32.67,7.81 v32.16,8.32 | 21.65,5.31 v18.25,8.7
  Bottom 0.127: v19.59,12.19 v20.48,13.08 | v28.48,5.46 v29.11,6.1 29.11,6.35 31.08,8.32 v32.16,8.32 | v18.25,8.7 v18.25,9.97
(copper drawn outside any net)
  shapes: Bottom area x1, Top area x1